# Altium PCB Line_detector_sensor.PcbDoc
Units mil, origin at the board's own origin, x right, y up, seen from the top; angles counter-clockwise.
Board outline 3464.57 x 1614.17 mil, 2 copper layers (Top Layer, Bottom Layer); 21 components, 12 nets, 72 pads, 4 vias.
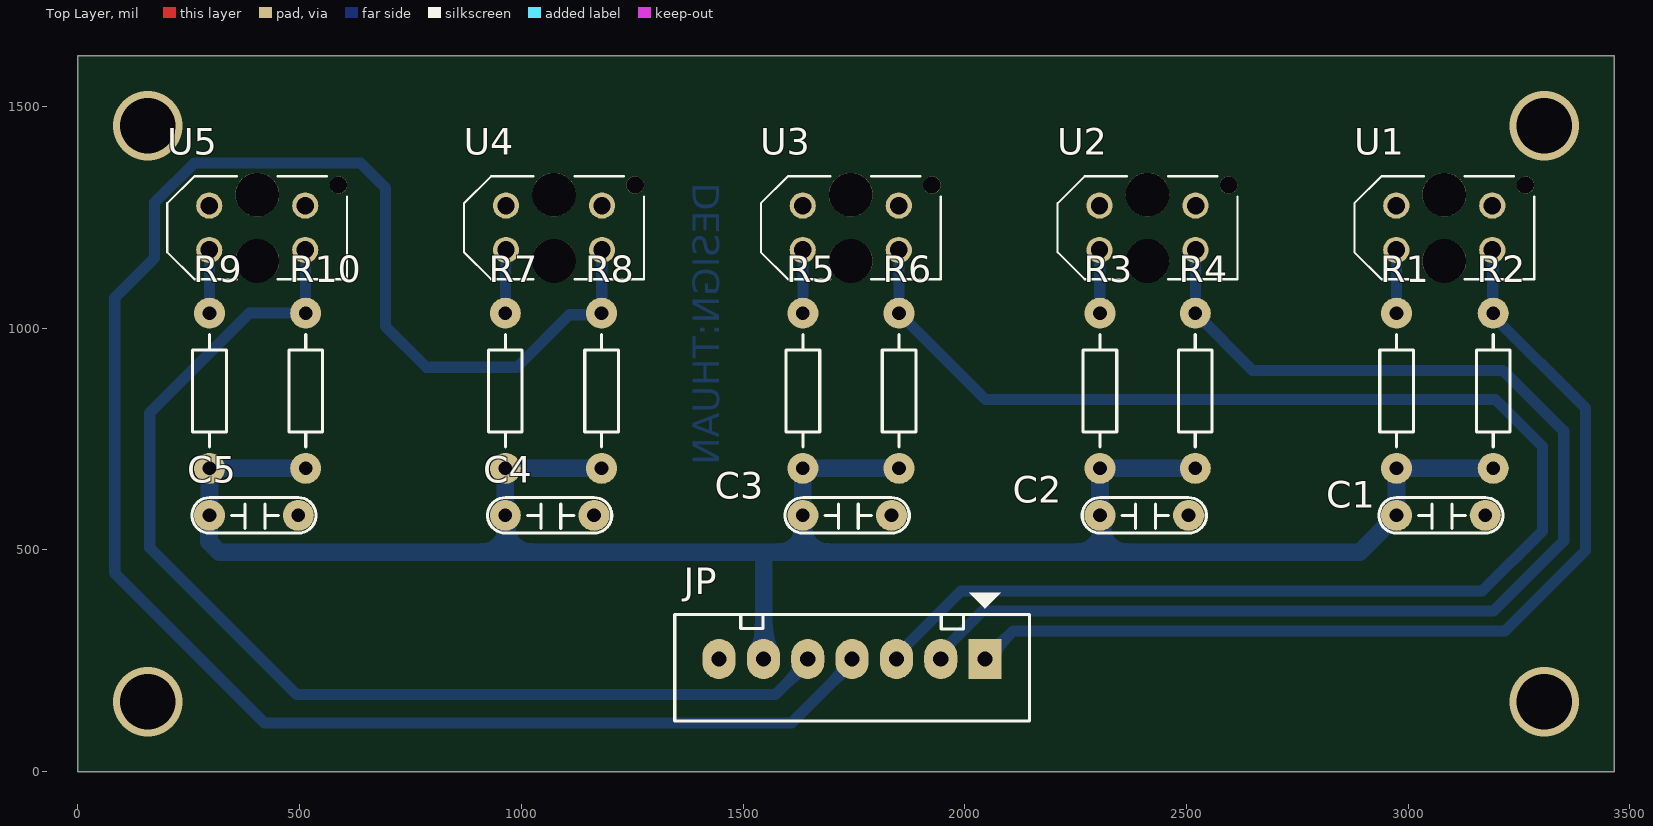
[diagram p0: Top Layer view]
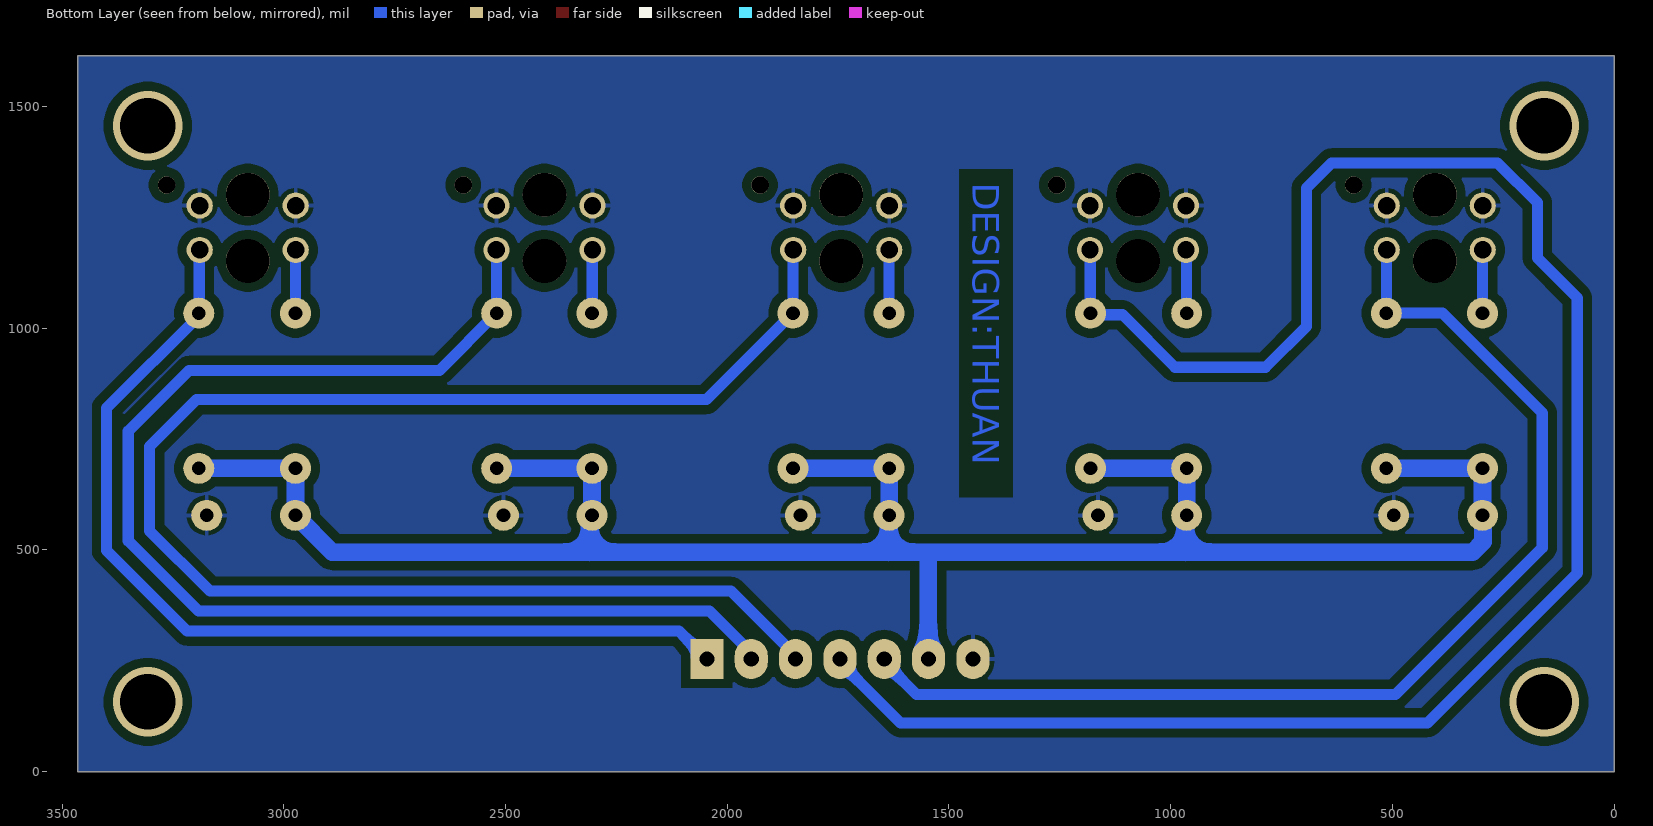
[diagram p1: Bottom Layer view, seen from below]
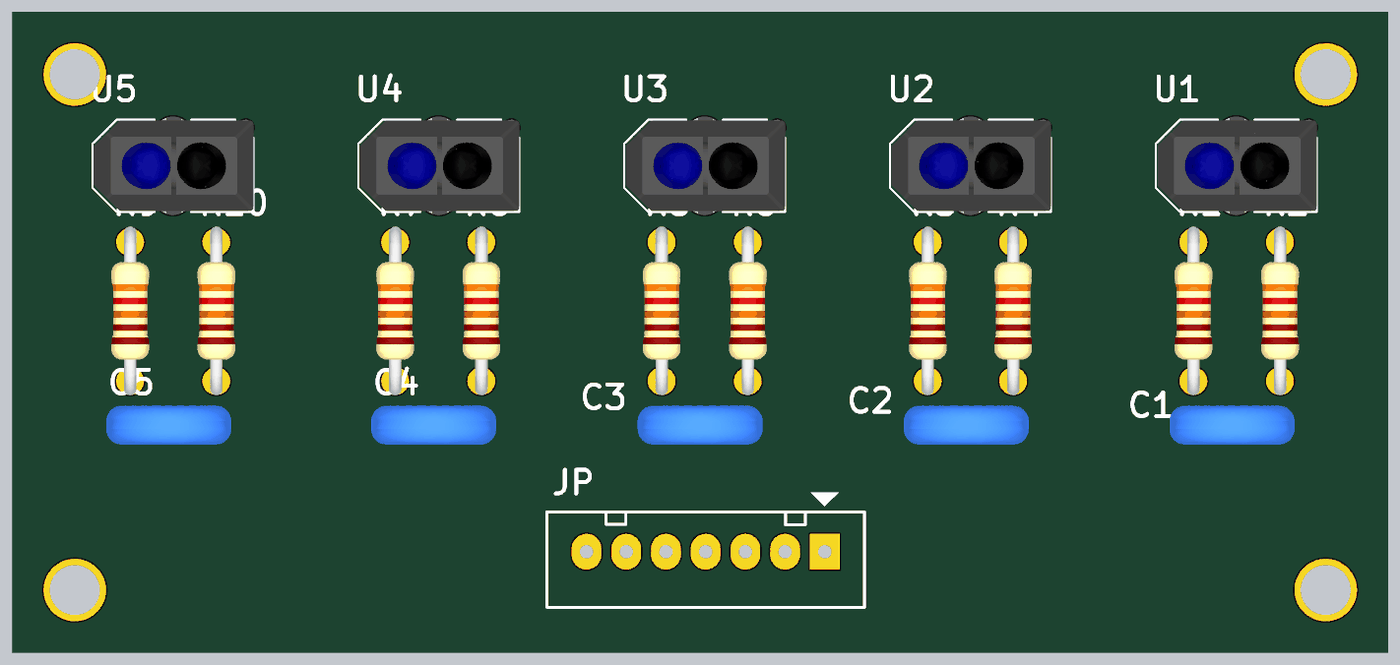
[diagram p2: 3D render of the assembled board from above, using the file's embedded part models]

## Layer stack, top to bottom
Top Solder: solder mask 0.4, Solder Resist, Dk 3.5
Top Layer: signal copper 1.4
Dielectric 1: dielectric 12.6, FR-4, Dk 4.8
Bottom Layer: signal copper 1.4
Bottom Solder: solder mask 0.4, Solder Resist, Dk 3.5

## Board outline
0,0 3464.57,0 3464.57,1614.17 0,1614.17

## Design rules (kind name [scope] priority, off if disabled: settings)
Clearance Clearance_5 [InNamedPolygon('GND')] p1: gap=20 ignorepadtopadclearanceinfootprint=FALSE
PolygonConnect [All] p1: connectstyle=Relief reliefconductorwidth=10 reliefentries=4 polygonreliefangle="90 Angle" airgapwidth=10
RoutingVias [All] p1: holewidth=28 width=50 viastyle="Through Hole" minholewidth=28 minwidth=50 maxholewidth=28 maxwidth=50
SolderMaskExpansion [All] p1: expansion=4 istentingtop=FALSE
Width [All] p1: maxlimit=40 minlimit=10 preferedwidth=30 toplayer_maxwidth=10 toplayer_prefwidth=10 bottomlayer_minwidth=25 minimp=50.000000 maximp=50.000000 favimp=50.000000
30 further rules are at their usual default settings.

## Components (designator, comment, footprint, x,y, rotation, side; value= is the part's Value field where it differs from the comment)
C1 "104" CN2 3174,578 r180 top value=0.1uF
C2 "104" CN2 2505,578 r180 top value=0.1uF
C3 "104" CN2 1835,578 r180 top value=0.1uF
C4 "104" CN2 1164,578 r180 top value=0.1uF
C5 "104" CN2 497,578 r180 top value=0.1uF
JP "JP7" CON7 2046,254 r180 top value="Connector 7"
R1 "330" R1/4W 2974,1034 r270 top value="R1/4W - 1K"
R2 "4k7" R1/4W 3192,1034 r270 top value="R1/4W - 1K"
R3 "330" R1/4W 2305,1034 r270 top value="R1/4W - 1K"
R4 "4k7" R1/4W 2520,1034 r270 top value="R1/4W - 1K"
R5 "330" R1/4W 1635,1034 r270 top value="R1/4W - 1K"
R6 "4k7" R1/4W 1852,1034 r270 top value="R1/4W - 1K"
R7 "330" R1/4W 964,1034 r270 top value="R1/4W - 1K"
R8 "4k7" R1/4W 1181,1034 r270 top value="R1/4W - 1K"
R9 "330" R1/4W 296.74,1034 r270 top value="R1/4W - 1K"
R10 "4k7" R1/4W 513.74,1034 r270 top value="R1/4W - 1K"
U1 "TCRT5000" OPTO_TCRT5000 3081.61,1226.54 r180 top
U2 "TCRT5000" OPTO_TCRT5000 2412.32,1226.54 r180 top
U3 "TCRT5000" OPTO_TCRT5000 1743.02,1226.54 r180 top
U4 "TCRT5000" OPTO_TCRT5000 1073.73,1226.54 r180 top
U5 "TCRT5000" OPTO_TCRT5000 404.44,1226.54 r180 top

## Footprints (in the part's own frame and the unit in brackets; to place one, negate y for a bottom-side part, rotate by r counter-clockwise, add the part's x,y. Pads: shape width x height; smd on the part's side, far side on the other; paste and mask are expansions set on the pad)
CN2 [mil]
  round 70 hole 31: 1(0,0) 2(200,0)
  silkscreen extent -40,-40 240,40, body extent -54,-44 260,55, height 407
CON7 [mil] "CON7"
  rect 75x90 hole 34: 1(0,0)
  oval 75x90 hole 34: 2(100,0) 3(200,0) 4(300,0) 5(400,0) 6(500,0) 7(600,0)
  silkscreen extent -100,-150 700,140
OPTO_TCRT5000 [mm]
  round 1.5 hole 1: A(2.75,1.27) CATH(2.75,-1.27) COLL(-2.75,1.27) E(-2.75,-1.27)
  round 1 hole 1 unplated: ""(-4.65,-2.45)
  round 2.5 hole 2.5 unplated: ""(0,1.9) ""(0,-1.9)
  silkscreen extent -5.15,-2.95 5.15,2.95, body extent -5.16,-3.4 5.04,3.4, height 6.71
R1/4W [mil] "R 1/4W, 2 Pin, 350mil"
  round 70 hole 31: 1(0,0) 2(350,0)
  silkscreen extent 48,-38 302,38, body extent -40,-47 386,47, height 111

## Part data
C1 C2 C3 C4 C5: library part CN2, "Cap np 104 => 105pF"
JP: library part Con7, "Connector 7"
R1 R2 R3 R4 R5 R6 R7 R8 R9 R10: library part R1/4W, "Resistor 1/4W"
U1 U2 U3 U4 U5: "950 nm 60 mA Through Hole Reflective Optical Sensor with Transistor Output", Package=None, Availability=Unavailable, MP=TCRT5000, Price=None

## Via types
v1: diameter 157.48, hole 125.98, Top Layer to Bottom Layer, 4 vias

## Nets (pads, with @x,y where several pads share a name; then routed paths per layer and width w, separated by ;. In a path a pad name is that pad's centre, name@x,y a point inside that pad or via, vN(x,y) a via of type N, cw(c..) or ccw(c..) an arc to the next point about the centre after c; other vN are vias at no path point)
+5V: C1.2 C2.2 C3.2 C4.2 C5.2 JP.6 R1.2 R2.2 R3.2 R4.2 R5.2 R6.2 R7.2 R8.2 R9.2 R10.2 | length 4885.8
  Bottom Layer w40: R10.2 R9.2 296.87,683.87 296.87,578.13 C5.2 295.68,576.68 295.68,518.43 319.11,495 967,495 ; R8.2 R7.2 C4.2 967,575 967,495 ; JP.6 1547,255 1547,490.04 ; R6.2 R5.2 C3.2 1636,577 1636,495 ; R4.2 R3.2 C2.2 2310,573 2310,495 ; R2.2 R1.2 C1.2 2891,495 2310,495 ; 967,495 1547,495 1636,495 ; 1636,495 2310,495
AOUT1: JP.1 R2.1 U1.COLL | length 2224.5
  Bottom Layer w25: JP.1 2046,261.5 2071,286.5 2078.5,286.5 2109,317 3218,317 3400,499 3400,820 3192,1028 R2.1 3190.94,1035.06 3190.94,1175.48 U1.COLL
AOUT2: JP.2 R4.1 U2.COLL | length 2855.5
  Bottom Layer w25: JP.2 1946,268.32 2039.68,362 3193,362 3351,520 3351,768 3214,905 2649,905 R4.1 2520.29,1034.29 2520.29,1176.25 U2.COLL
AOUT3: JP.3 R6.1 U3.COLL | length 3489.6
  Bottom Layer w25: JP.3 1846,261.5 1991.5,407 3167,407 3303,543 3303,733 3197,839 2047,839 R6.1 1851.65,1034.35 1851.65,1176.19 U3.COLL
AOUT4: JP.4 R8.1 U4.COLL | length 4351.9
  Bottom Layer w25: U4.COLL 1181.5,1176.04 1181.5,1034.5 R8.1 1177.5,1030.5 1108.5,1030.5 990,912 786,912 694,1004 694,1316 636.94,1373.06 263.06,1373.06 173.03,1283.03 173.03,1158.03 83,1068 83,448 421,110 1609.5,110 1746,246.5 JP.4
AOUT5: JP.5 R10.1 U5.COLL | length 2550.5
  Bottom Layer w25: U5.COLL 513.22,1176.03 513.22,1034.52 R10.1 387,1034 162,809 162,505 493,174 1573.5,174 1646,246.5 JP.5
GND: C1.1 C2.1 C3.1 C4.1 C5.1 JP.7 U1.CATH U1.E U2.CATH U2.E U3.CATH U3.E U4.CATH U4.E U5.CATH U5.E
NetR1_1: R1.1 U1.A | length 142.8
  Bottom Layer w25: U1.A 2973.67,1176.21 2973.67,1034.33 R1.1
NetR3_1: R3.1 U2.A | length 142.9
  Bottom Layer w25: U2.A 2304.52,1176.07 2304.52,1034.48 R3.1
NetR5_1: R5.1 U3.A | length 142.6
  Bottom Layer w25: U3.A 1634.88,1176.42 1634.88,1034.12 R5.1
NetR7_1: R7.1 U4.A | length 143.1
  Bottom Layer w25: R7.1 964.73,1034.73 964.73,1175.81 U4.A
NetR9_1: R9.1 U5.A | length 142.8
  Bottom Layer w25: U5.A 296.46,1176.26 296.46,1034.28 R9.1
pads on no net: U1. U2. U3. U4. U5.
copper on no net:
  other v1: 157.48,157.48 3307.09,157.48 157.48,1456.69 3307.09,1456.69

## Polygon pours and split planes (outlines as drawn)
GND on Bottom Layer "GND" (solid, remove dead copper, pour order 0): 0,0 3464.57,0 3464.57,1614.17 0,1614.17

## Other copper
Bottom Layer:
  text "DESIGN:THUAN" at 1446.69,1328.58 h60 r90